# Altium PCB PCB2.PcbDoc
Units mil, origin at the board's own origin, x right, y up, seen from the top; angles counter-clockwise.
Board outline 6000 x 4000 mil, 2 copper layers (Top Layer, Bottom Layer); 11 components, 9 nets, 60 pads, 3 vias.
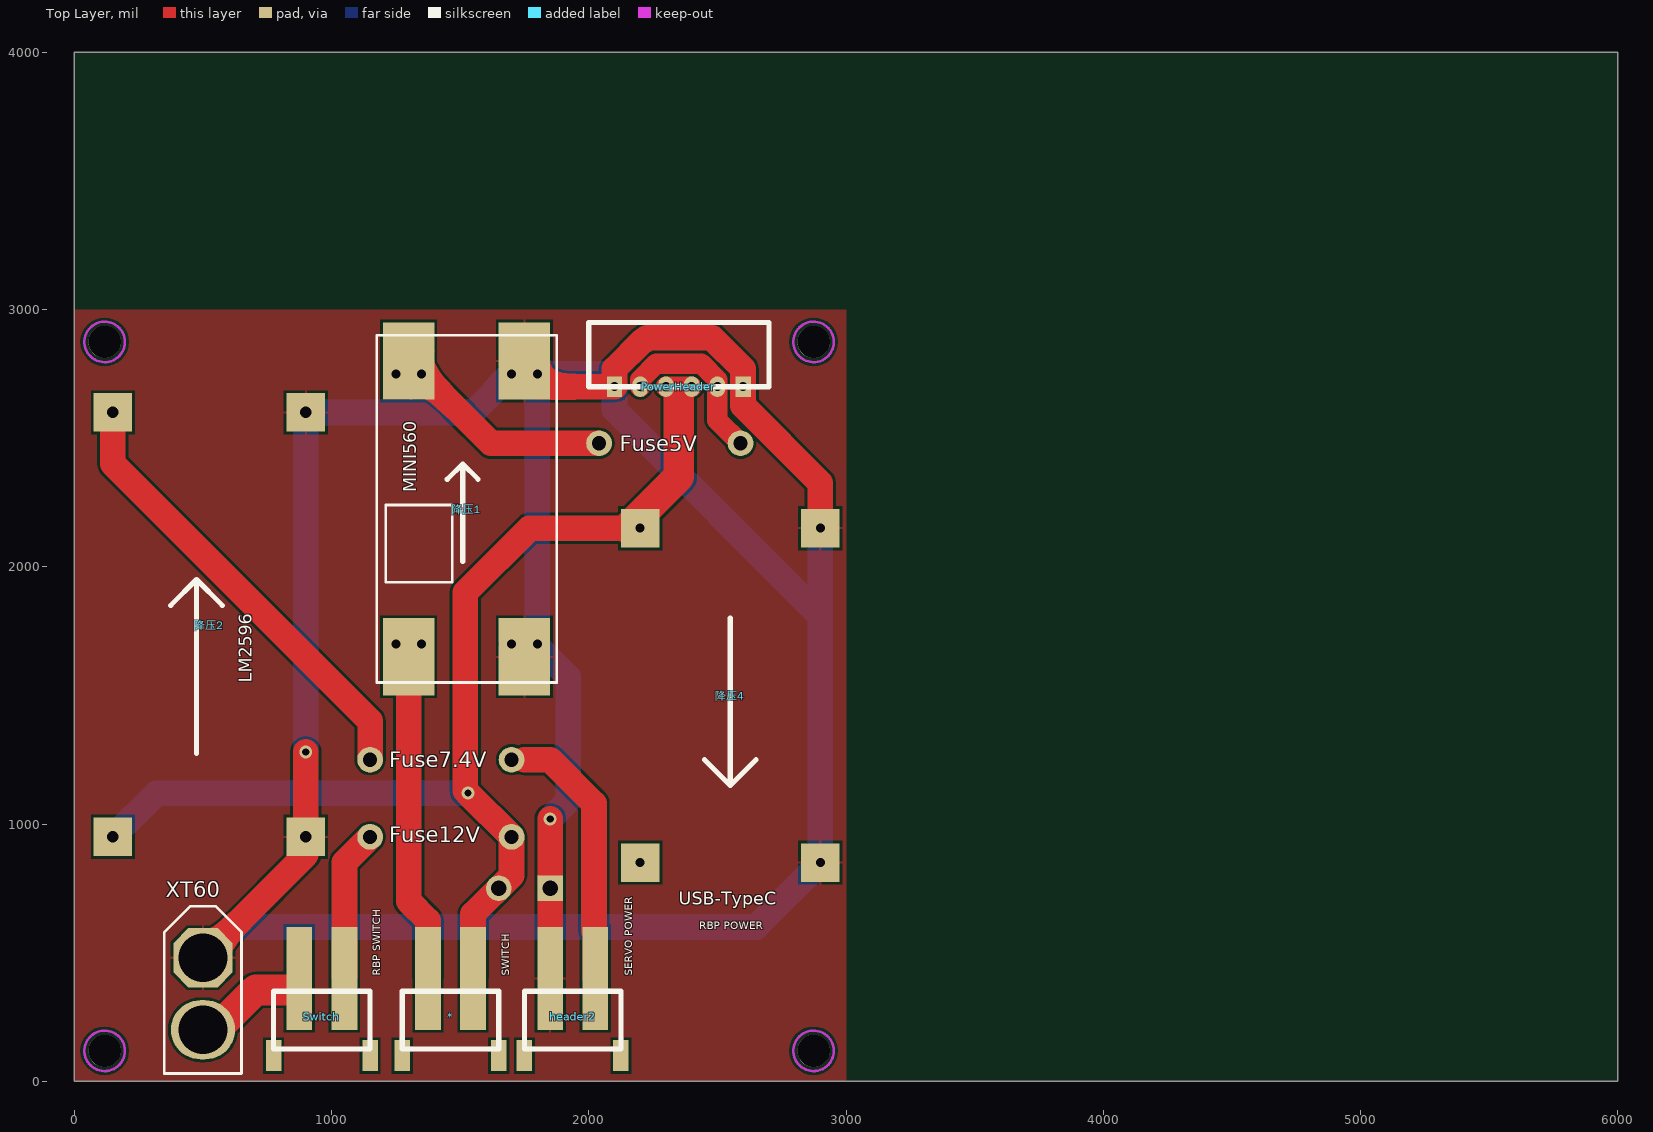
[diagram p0: Top Layer view]
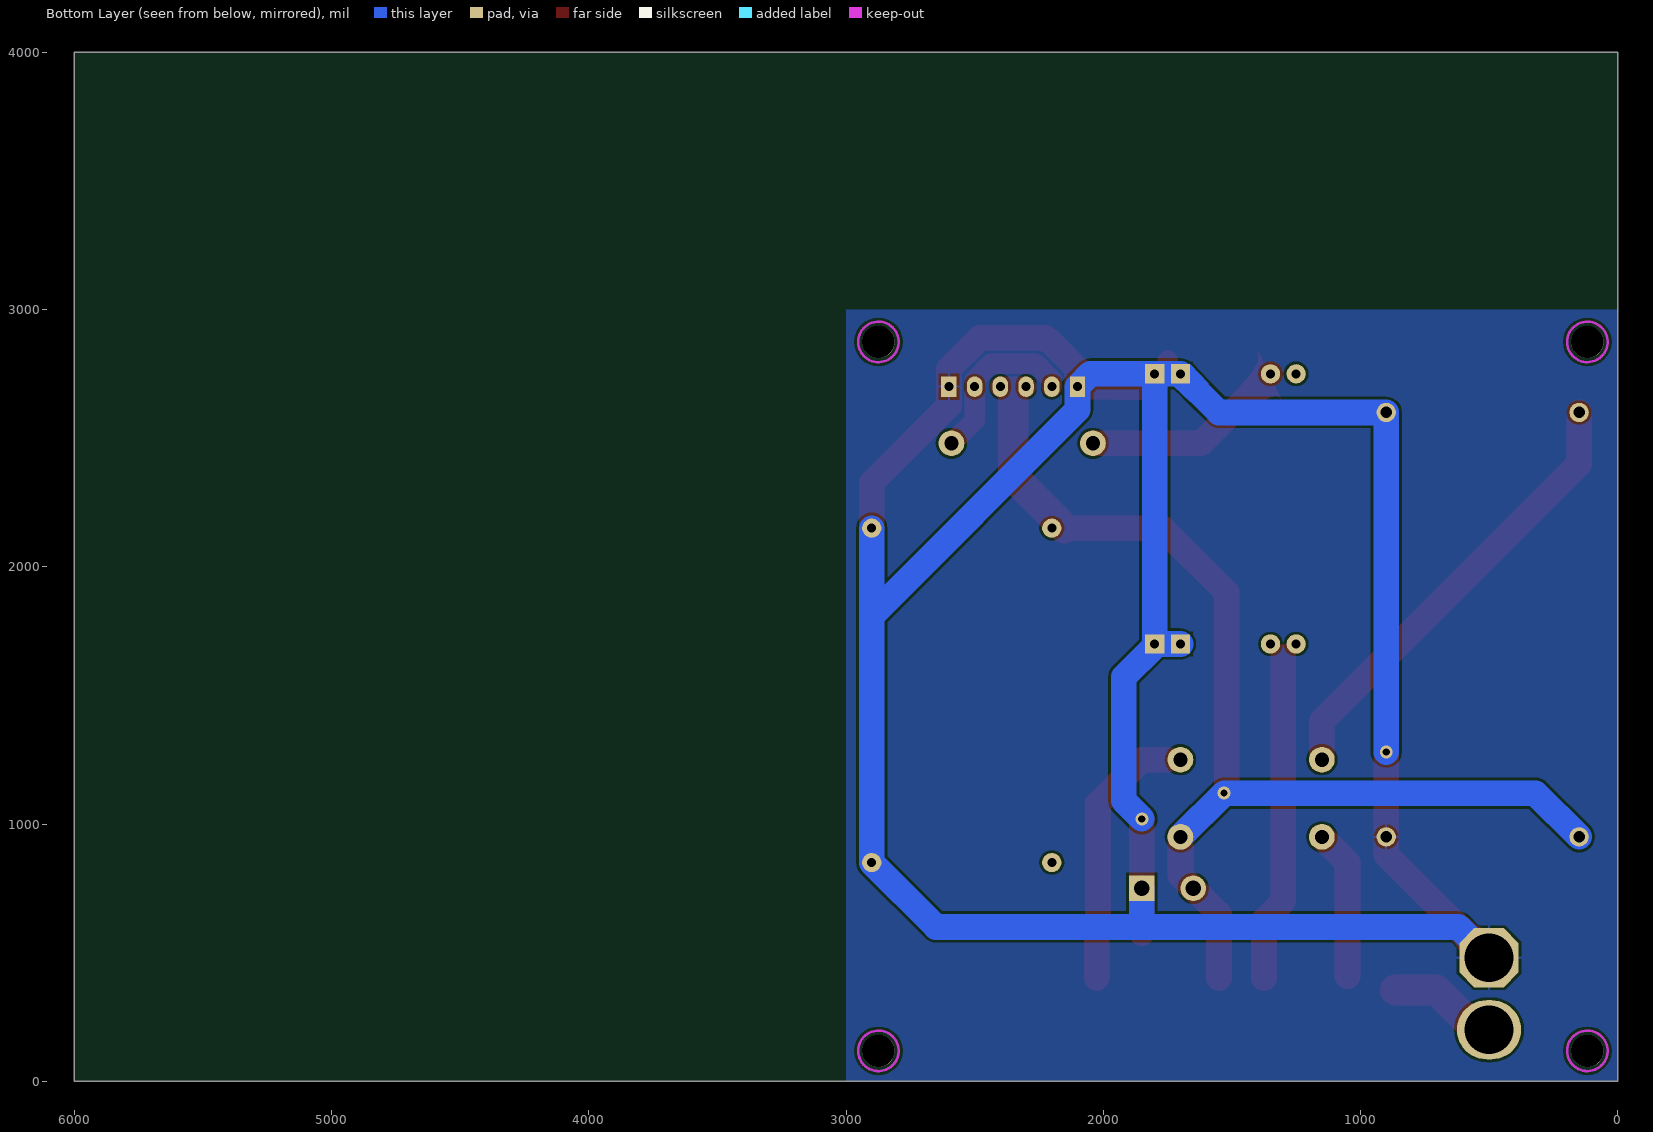
[diagram p1: Bottom Layer view, seen from below]

## Layer stack, top to bottom
Top Solder: solder mask 0.4, Solder Resist, Dk 3.5
Top Layer: signal copper 1.4
Dielectric 1: dielectric 12.6, FR-4, Dk 4.8
Bottom Layer: signal copper 1.4
Bottom Solder: solder mask 0.4, Solder Resist, Dk 3.5

## Board outline
0,0 6000,0 6000,4000 0,4000

## Design rules (kind name [scope] priority, off if disabled: settings)
Clearance [All] p1: gap=10 ignorepadtopadclearanceinfootprint=FALSE except(0: Arc-Hole Track-Hole SMDPad-Hole THPad-Hole Via-Hole Fill-Hole Poly-Hole Region-Hole Text-Hole)
PolygonConnect [All] p1: connectstyle=Relief reliefconductorwidth=10 reliefentries=4 polygonreliefangle="90 Angle" airgapwidth=10
RoutingVias [All] p1: holewidth=28 width=50 viastyle="Through Hole" minholewidth=28 minwidth=50 maxholewidth=28 maxwidth=50
SolderMaskExpansion [All] p1: expansion=4 istentingtop=FALSE
Width [All] p1: maxlimit=120 minlimit=50 preferedwidth=100 minimp=50.000000 maximp=50.000000 favimp=50.000000
30 further rules are at their usual default settings.

## Components (designator, comment, footprint, x,y, rotation, side; value= is the part's Value field where it differs from the comment)
* "SwitchFree" SwitchFree 1375,350 r90 top
Fuse5V "保险丝" FUSE 2040,2480 r0 top
Fuse7.4V "" FUSE 1150,1250 r0 top
Fuse12V "保险丝" FUSE 1150,950 r0 top
header2 "header2" HEADER2 1850,350 r90 top
PowerHeader "PowerHeader" PowerHeader 2600,2700 r270 top locked
Switch "SwitchFree" SwitchFree 875,350 r90 top
XT60 "XT60" XT60 500,480 r270 top
降压1 "降压模块" 贴片1 1300,1650 r90 top
降压2 "降压模块" XL4015 150,950 r90 top locked
降压4 "降压模块" 贴片4-USB 2200,850 r90 top

## Footprints (in the part's own frame and the unit in brackets; to place one, negate y for a bottom-side part, rotate by r counter-clockwise, add the part's x,y. Pads: shape width x height; smd on the part's side, far side on the other; paste and mask are expansions set on the pad)
FUSE [mil] "保险丝"
  round 100 hole 55: V+(0,0) V-(550,0)
HEADER2 [mil]
  rect 400x100 smd: 7.4V(50,-175) GND(50,0)
  rect 120x60 smd: none(-250,100) none(-250,-275)
  silkscreen extent -225,-275 0,100
PowerHeader [mil]
  oval 80x60 hole 35: 5V(0,-100) 5V(0,-400) 12V(0,-200) 12V(0,-300)
  rect 80x60 hole 35: GND(0,0) GND(0,-500)
  silkscreen extent -250,-600 0,100
SwitchFree [mil]
  rect 120x60 smd: none(-250,100) none(-250,-275)
  rect 400x100 smd: V+(50,0) V-(50,-175)
  silkscreen extent -225,-275 0,100
XL4015 [mil]
  rect 150x150 smd: IN+(0,0) IN-(0,-750) OUT+(1650,0) OUT-(1650,-750)
  round 75 hole 45: IN+(0,0) IN-(0,-750) OUT+(1650,0) OUT-(1650,-750)
  silkscreen extent 325,-425 1000,-225
XT60 [mil]
  oval 230x250 hole 190: V+(280,0)
  oct 230x230 hole 190: V-(0,0)
  silkscreen extent -200,-150 450,150
贴片1 [mil]
  rect 300x200 smd: IN+(0,0) IN-(0,-450) OUT+(1150,0) OUT-(1150,-450)
  round 75 hole 35: IN+(50,-50) IN+(50,50) OUT+(1100,-50) OUT+(1100,50)
  rect 75x75 hole 35: IN-(50,-400) IN-(50,-500) OUT-(1100,-500) OUT-(1100,-400)
  silkscreen extent -100,-575 1250,125
贴片4-USB [mil]
  rect 150x150 smd: IN+(1300,0) IN-(1300,-700) OUT+(0,0) OUT-(0,-700)
  round 75 hole 35: IN+(1300,0) IN-(1300,-700) OUT+(0,0) OUT-(0,-700)
  silkscreen extent 300,-450 950,-250

## Part data
Fuse5V Fuse12V: library part Fuse
Fuse7.4V: library part Fuse, "保险丝"
降压1: library part 降压_1
降压2: library part 降压2, "XL4015"
降压4: library part 降压_4

## Free pads (board coordinates)
  round 125.98 hole 125.98: 256(118.11,118.11) 256(118.11,2874.02) 256(2874.02,118.11) 256(2874.02,2874.02)
  rect 100x100 hole 60: 267(1850,750)
  round 100 hole 60: 268(1650,750)

## Via types
v1: diameter 50, hole 28, Top Layer to Bottom Layer, 3 vias

## Nets (pads, with @x,y where several pads share a name; then routed paths per layer and width w, separated by ;. In a path a pad name is that pad's centre, name@x,y a point inside that pad or via, vN(x,y) a via of type N, cw(c..) or ccw(c..) an arc to the next point about the centre after c; other vN are vias at no path point)
7.4V: Fuse7.4V.V+ 降压2.OUT+ | length 1764.2
  Top Layer w100: 降压2.OUT+@150,2600 150,2400 1150,1400 Fuse7.4V.V+
+5: Fuse5V.V+ 降压1.OUT+ | length 801.8
  Top Layer w100: 降压1.OUT+@1350,2750 1620,2480 Fuse5V.V+
+12: *.V- Fuse12V.V- pad.268 PowerHeader.12V 降压2.IN+ 降压4.IN+ | length 4773.9
  Top Layer w80: PowerHeader.12V@2300,2700 PowerHeader.12V@2400,2700
  Top Layer w100: *.V- 1550,650 1700,800 Fuse12V.V- v1(1530,1120) 1520,1130 1520,1900 1770,2150 降压4.IN+@2150,2150
  Top Layer w120: 降压4.IN+@2150,2150 2350,2350 2350,2680
  Bottom Layer w100: 降压2.IN+@150,950 320,1120 v1(1530,1120) Fuse12V.V-
GND: header2.GND pad.267 PowerHeader.GND XT60.V- 降压1.IN- 降压1.OUT- 降压2.IN- 降压2.OUT- 降压4.IN- 降压4.OUT- | length 12959.7
  Top Layer w80: 降压1.OUT-@1750,2800 1750,2760 降压1.OUT-@1790,2720
  Top Layer w100: XT60.V- 900,880 900,950 v1(900,1280) ; 降压1.OUT-@1800,2700 2100,2700 2100,2768.7 2211.3,2880 2215.44,2880 2225.44,2890 2478.7,2890 2600,2768.7 2600,2625.56 2900,2325.56 降压4.IN-@2900,2150 ; header2.GND@1850,575 pad.267 v1(1850,1020)
  Bottom Layer w100: XT60.V- 620,600 1860,600 ; v1(900,1280) 900,2600 1550,2600 1700,2750 降压1.OUT-@1800,2750 ; 降压1.IN-@1700,1700 降压1.IN-@1800,1700 ; pad.267 1850,610 1860,600 ; v1(1850,1020) 1920,1090 1920,1571.42 1800,1691.42 降压1.IN-@1800,1700 ; 降压4.IN-@2900,2150 2900,1810 ; 降压1.IN-@1800,1700 降压1.OUT-@1800,2750 ; 降压1.OUT-@1800,2750 2050,2750 2100,2700 2100,2610 2900,1810 ; 1860,600 2000,600 2650,600 2900,850 2900,1810
Net*_V+: *.V+ 降压1.IN+ | length 1281.1
  Top Layer w100: 降压1.IN+@1300,1650 1300,700 1375,625 *.V+
NetFuse5V_V-: Fuse5V.V- PowerHeader.5V | length 663.8
  Top Layer w80: PowerHeader.5V@2200,2700 2200,2727.28 2262.72,2790 2437.28,2790 2500,2727.28 2500,2570 Fuse5V.V-
NetFuse7.4V_V-: Fuse7.4V.V- header2.7.4V | length 1022.5
  Top Layer w100: 1750,1250 1850,1250 2020,1080 2020,584.29 2025,579.29 header2.7.4V
NetFuse12V_V+: Fuse12V.V+ Switch.V- | length 583.6
  Top Layer w100: Switch.V-@1050,407.84 1050,850 Fuse12V.V+
NetSwitch_V+: Switch.V+ XT60.V+ | length 429.3
  Top Layer w120: XT60.V+ 521.05,221.05 571.05,221.05 705.29,355.29 Switch.V+@865,355.29
pads on no net: *.none header2.none Switch.none 降压4.OUT+

## Polygon pours and split planes (outlines as drawn)
GND on Top Layer "GND_L02_P-001" (solid, remove dead copper, pour order 1): 0,3000 0,0 3000,0 3000,3000
GND on Bottom Layer "GND_L02_P-001" (solid, remove dead copper, pour order 0): 0,3000 3000,3000 3000,0 0,0

## Keep-outs
Keep-Out Layer:
  circle w10: c118.11,2874.02 r78.74
  circle w10: c2874.02,2874.02 r78.74
  circle w10: c2874.02,118.11 r78.74
  circle w10: c118.11,118.11 r78.74

## Silkscreen, mask and mechanical layers (free items; w line width, h text height)
Top Overlay:
  text "MINI560" at 1330,2290 h50 r90
  text "LM2596" at 690,1550 h50 r90
  text "USB-TypeC" at 2350,686.66 h50
  text "RBP POWER" at 2430,590 h30
  text "RBP SWITCH" at 1190,410 h30 r90
  text "SWITCH" at 1690,410 h30 r90
  text "SERVO POWER" at 2170,410 h30 r90
Mechanical 1:
  lines w20: 0,0 3000,0 3000,3000 0,3000 0,0